# EAGLE board CapAudyn (EAGLE 3.55)

No outline drawn. Coordinates in mm, seen from the top.
Copper layers used: 

## Footprints (pad centres in the part's own frame; a part is rotated, then mirrored left to right if it is on the bottom)
*9Ï,5 = drill 0.813 pad 2.54 octagon:  -10.16,0;  10.16,0
*10 = drill 0.813 pad 2.54 octagon:  10.16,0;  -10.16,0
*10,5 = drill 0.813 pad 2.54 octagon:  10.16,0;  -10.16,0
*11,2 = drill 0.813 pad 2.54 octagon:  10.16,0;  -10.16,0
*12 = drill 0.813 pad 2.54 octagon:  10.16,0;  -10.16,0
*13,5 = drill 0.813 pad 2.54 octagon:  10.16,0;  -10.16,0
*12,5 = drill 0.813 pad 2.54 octagon:  12.7,0;  -12.7,0
*15,5 = drill 0.813 pad 2.54 octagon:  15.24,0;  -15.24,0
*17 = drill 0.813 pad 2.54 octagon:  17.78,0;  -17.78,0
*18 = drill 0.813 pad 2.54 octagon:  17.78,0;  -17.78,0
*19,5 = drill 1.27 pad 3.81 octagon:  17.78,0;  -17.78,0
*21,5 = drill 1.27 pad 3.81 octagon:  17.78,0;  -17.78,0
*23,5 = drill 1.27 pad 3.81 octagon:  17.78,0;  -17.78,0
*23 = drill 1.27 pad 3.81 octagon:  20.32,0;  -20.32,0
*26 = drill 1.27 pad 3.81 octagon:  20.32,0;  -20.32,0
*28,5 = drill 1.27 pad 3.81 octagon:  24.13,0;  -24.13,0
*34 = drill 1.422 pad 5.08 octagon:  24.13,0;  -24.13,0
*38,5 = drill 1.422 pad 5.08 octagon:  27.94,0;  -27.94,0
*44 = drill 1.676 pad 5.08 octagon:  30.48,0;  -30.48,0
*50 = drill 1.676 pad 5.08 octagon:  33.02,0;  -33.02,0
*54 = drill 1.676 pad 5.08 octagon:  33.02,0;  -33.02,0

## Placement (x,y rotation side)
0.1æ  [*9Ï,5]  19.05,246.38 0 top
0.22æ  [*10]  43.18,246.38 0 top
0.33æ  [*10,5]  67.31,246.38 0 top
0.47æ  [*11,2]  91.44,246.38 0 top
0.56æ  [*12]  115.57,246.38 0 top
0.68æ  [*13,5]  139.7,246.38 0 top
0.82æ  [*11,2]  166.37,246.38 0 top
1.5æ  [*13,5]  52.07,228.6 0 top
1æ  [*12,5]  21.59,228.6 0 top
2.2æ  [*15,5]  85.09,228.6 0 top
3.3æ  [*17]  121.92,228.6 0 top
3.9æ  [*18]  161.29,228.6 0 top
4.7æ  [*19,5]  26.67,205.74 0 top
5.6æ  [*21,5]  69.85,205.74 0 top
6.8æ  [*23,5]  114.3,205.74 0 top
8.2æ  [*23]  158.75,205.74 0 top
10æ  [*26]  29.21,173.99 0 top
15æ  [*28,5]  88.9,173.99 0 top
22æ  [*34]  153.67,173.99 0 top
33æ  [*38,5]  35.56,133.35 0 top
47æ  [*44]  105.41,133.35 0 top
68æ  [*50]  40.64,85.09 0 top
82æ  [*54]  40.64,30.48 0 top
100æ  [*54]  120.65,30.48 0 top
TQFP1  [-35SC]  0,0 0 top

## Library data of the parts
0.1æ 0.22æ 0.33æ 0.47æ 0.56æ 0.68æ 0.82æ 1.5æ 1æ 2.2æ 3.3æ 3.9æ 4.7æ 5.6æ 6.8æ 8.2æ 10æ 15æ 22æ 33æ 47æ 68æ 82æ 100æ = cap-audy
TQFP1 = BLATT